# Altium PCB belt_control_V2.0.PcbDoc
Units mm, origin at the board's own origin, x right, y up, seen from the top; angles counter-clockwise.
Board outline 113.72 x 77.67 mm, 2 copper layers (Top Layer, Bottom Layer); 118 components, 83 nets, 434 pads, 124 vias.
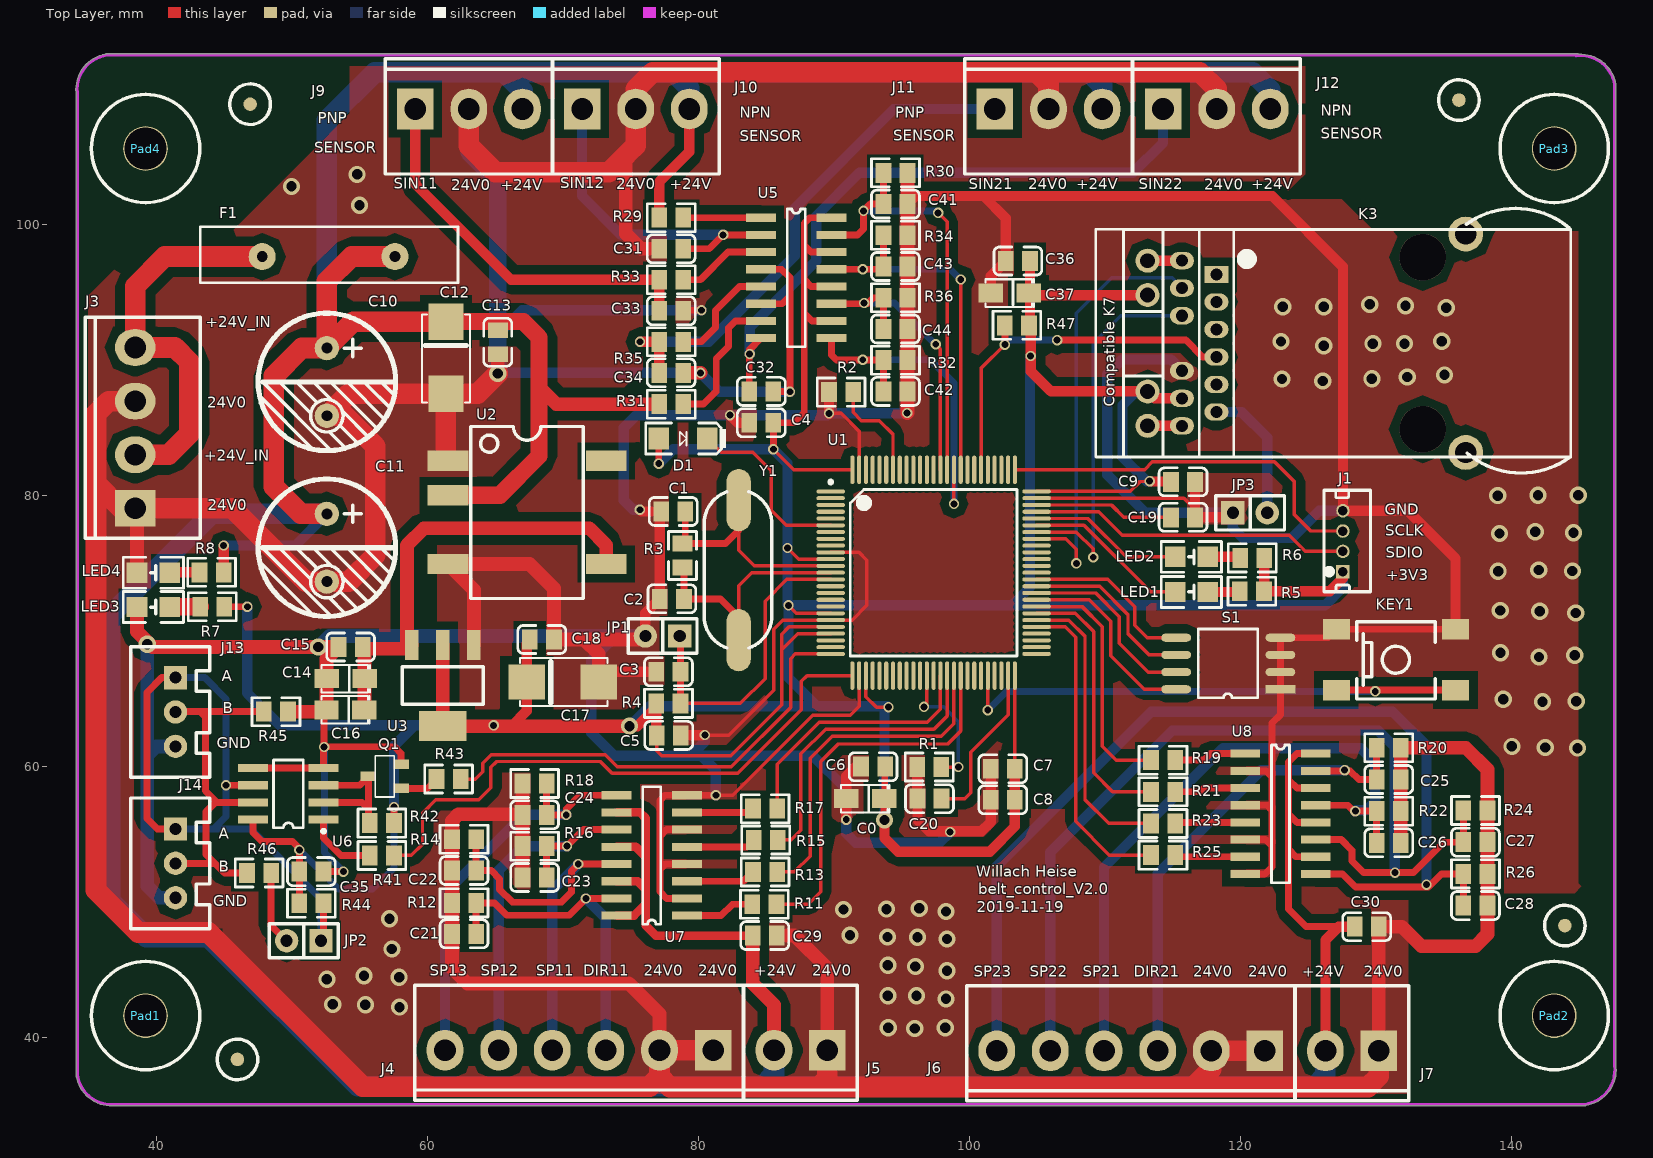
[diagram p0: Top Layer view]
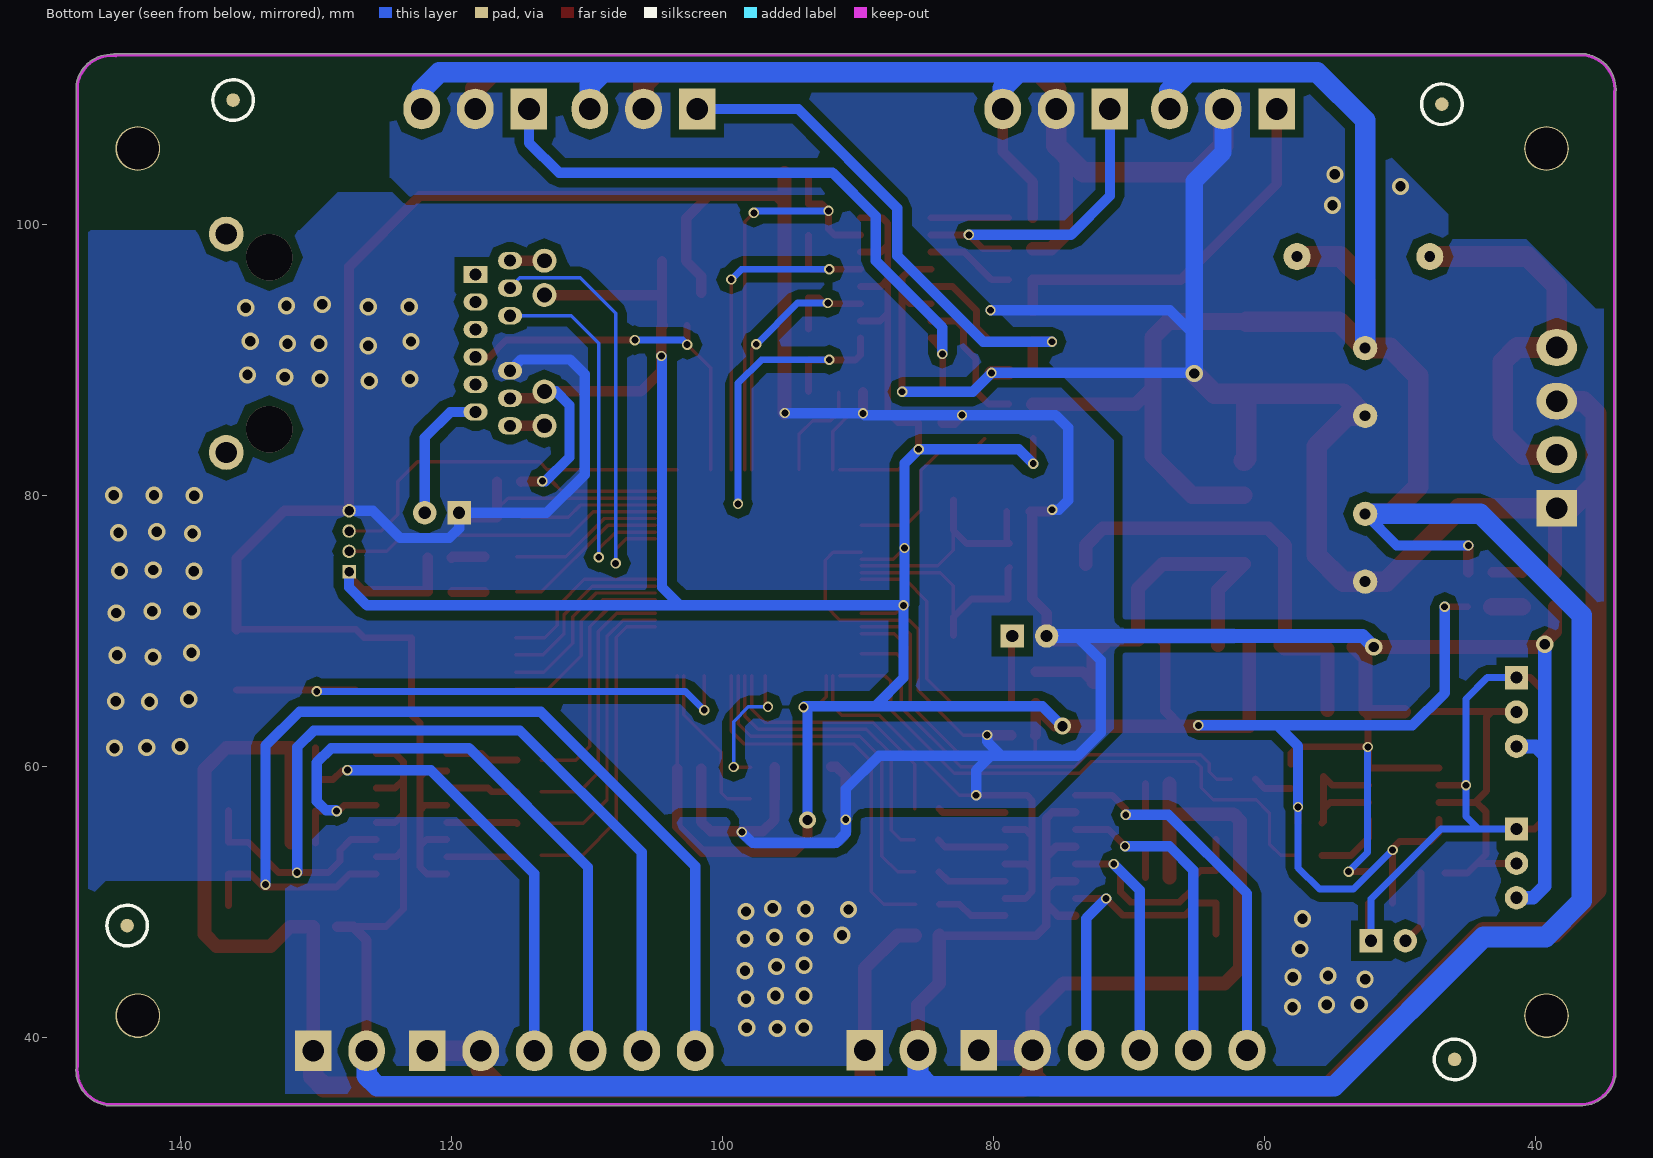
[diagram p1: Bottom Layer view, seen from below]
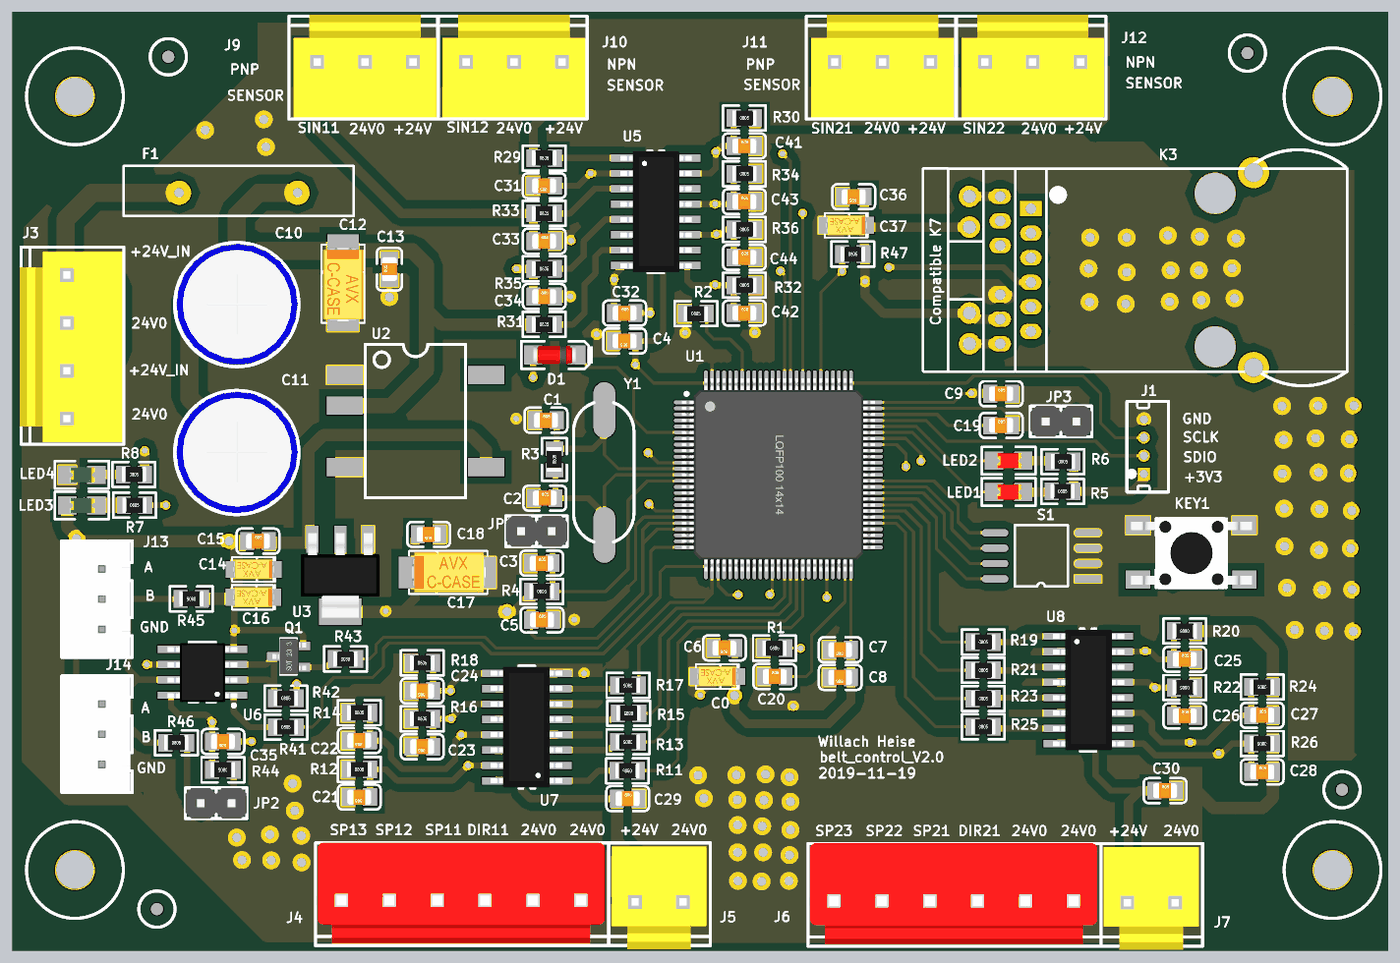
[diagram p2: 3D render of the assembled board from above, using the file's embedded part models]

## Layer stack, top to bottom
Top Solder: solder mask 0.0102, Solder Resist, Dk 3.5
Top Layer: signal copper 0.0356
Dielectric 1: dielectric 0.32, FR-4, Dk 4.8
Bottom Layer: signal copper 0.0356
Bottom Solder: solder mask 0.0102, Solder Resist, Dk 3.5

## Board outline
34.057,37.1 cw(c34.138,37.16) 34.037,37.16 34.037,109.75 cw(c36.664,109.982) 36.182,112.574 cw(c36.246,112.497) 36.246,112.597 144.932,112.597 cw(c144.932,112.497) 145.002,112.569 cw(c145.121,109.935) 147.724,110.354 cw(c147.625,110.338) 147.725,110.338 147.725,37.903 cw(c145.11,37.567) 147.747,37.567 cw(c145.11,37.567) 145.517,34.962 cw(c145.44,35.027) 145.44,34.926 36.728,34.926 cw(c36.728,35.027) 36.7,34.93 cw(c36.652,37.567)

## Design rules (kind name [scope] priority, off if disabled: settings)
Clearance Clearance_1 [InPolygon] p1: gap=0.635
Clearance [All] p2: gap=0.152
ComponentClearance [All] p1: gap=0 collisioncheckmode=3 verticalgap=0 showdistances=FALSE
HoleSize [All] p1: absolutevalues=TRUE maxlimit=5 minlimit=0.025 maxpercent=80.000 minpercent=20.000
HoleToHoleClearance [All] p1: gap=0 allowstackedmicrovias=TRUE
MinimumSolderMaskSliver [All] p1: minsoldermaskwidth=0
PlaneConnect [All] p1: planeconnectstyle=Direct reliefexpansion=0.508 reliefentries=4 reliefconductorwidth=0.254 reliefairgap=0.254
PolygonConnect [All] p1: connectstyle=Direct reliefconductorwidth=0.5 reliefentries=4 polygonreliefangle="90 Angle" airgapwidth=0.254
RoutingVias [All] p1: holewidth=0.4 width=0.8 viastyle="Through Hole" minholewidth=0.4 minwidth=0.8 maxholewidth=0.8 maxwidth=1.5
SilkToSilkClearance [All] p1: silktosilkclearance=0
SilkToSolderMaskClearance [IsPad] p1: minsilkscreentomaskgap=0 clearancetoexposedcopper=TRUE
SolderMaskExpansion [All] p1: expansion=0.102
Width [All] p1: maxlimit=5 minlimit=0.254 preferedwidth=0.508
22 further rules are at their usual default settings.

## Classes and differential pairs
component class power: C10 C11 C12 C13 C14 C15 C16 C17 C18 F1 J3 LED3 LED4 Pad1 Pad2 Pad3 Pad4 R7 R8 U2 U3
component class senror_input: C31 C32 C33 C34 C41 C42 C43 C44 J9 J10 J11 J12 R29 R30 R31 R32 R33 R34 R35 R36 U5
component class belt_output: C21 C22 C23 C24 C25 C26 C27 C28 C29 C30 J4 J5 J6 J7 R11 R12 R13 R14 R15 R16 R17 R18 R19 R20 R21 R22 R23 R24 R25 R26 U7 U8
component class communication: C35 C36 C37 J13 J14 JP2 JP3 K3 Q1 R41 R42 R43 R44 R45 R46 R47 U6
component class cpu: C0 C1 C2 C3 C4 C5 C6 C7 C8 C9 C19 C20 D1 J1 JP1 KEY1 LED1 LED2 R1 R2 R3 R4 R5 R6 S1 U1 Y1

## Components (designator, comment, footprint, x,y, rotation, side; value= is the part's Value field where it differs from the comment)
C0 "10uF/16V" CASE-A_3216 92.304,57.607 r180 top
C1 "22pF" 0805_CAP 78.13,78.816 r0 top
C2 "22pF" 0805_CAP 78.029,72.365 r0 top
C3 "0.1uF" 0805_CAP 77.775,66.98 r0 top
C4 "0.1uF" 0805_CAP 84.633,85.369 r180 top
C5 "0.1uF" 0805_CAP 77.8,62.281 r0 top
C6 "0.1uF" 0805_CAP 92.888,59.969 r180 top
C7 "0.1uF" 0805_CAP 102.464,59.817 r180 top
C8 "0.1uF" 0805_CAP 102.464,57.531 r180 top
C9 "0.1uF" 0805_CAP 115.773,81.001 r0 top
C10 "470uF/35V" CE/10MM 52.553,90.881 r270 top
C11 "470uF/35V" CE/10MM 52.553,78.638 r270 top
C12 "10uF/35V" TC6032_C 61.341,90.17 r270 top
C13 "0.1uF" 0805_CAP 65.176,91.313 r90 top
C14 "10uF/16V" CASE-A_3216 53.95,66.472 r180 top
C15 "0.1uF" 0805_CAP 54.305,68.809 r0 top
C16 "10uF/16V" CASE-A_3216 53.924,64.16 r180 top
C17 "100uF/16V" TC6032_C 69.977,66.218 r0 top
C18 "0.1uF" 0805_CAP 68.428,69.367 r180 top
C19 "10uF" 0805_CAP 115.773,78.384 r0 top
C20 "10uF" 0805_CAP 97.053,57.607 r0 top
C21 "0.1uF" 0805_CAP 62.684,47.625 r180 top
C22 "0.1uF" 0805_CAP 62.684,52.299 r180 top
C23 "0.1uF" 0805_CAP 67.891,51.791 r180 top
C24 "0.1uF" 0805_CAP 67.891,56.413 r180 top
C25 "0.1uF" 0805_CAP 130.962,59.026 r0 top
C26 "0.1uF" 0805_CAP 130.962,54.345 r0 top
C27 "0.1uF" 0805_CAP 137.367,54.393 r0 top
C28 "0.1uF" 0805_CAP 137.367,49.712 r0 top
C29 "0.1uF" 0805_CAP 84.887,47.498 r0 top
C30 "0.1uF" 0805_CAP 129.337,48.158 r0 top
C31 "0.1uF" 0805_CAP 77.978,98.217 r180 top
C32 "0.1uF" 0805_CAP 84.633,87.681 r0 top
C33 "0.1uF" 0805_CAP 77.978,93.635 r0 top
C34 "0.1uF" 0805_CAP 77.978,89.052 r0 top
C35 "0.1uF" 0805_CAP 51.41,52.222 r180 top
C36 "0.1uF" 0805_CAP 103.581,97.307 r180 top
C37 "10uF/16V" CASE-A_3216 102.972,94.945 r180 top
C41 "0.1uF" 0805_CAP 94.539,101.514 r0 top
C42 "0.1uF" 0805_CAP 94.539,87.681 r0 top
C43 "0.1uF" 0805_CAP 94.539,96.903 r0 top
C44 "0.1uF" 0805_CAP 94.539,92.292 r0 top
D1 "1N4148" LL-34(玻璃二极管) 77.064,84.201 r0 top
F1 "X30_UF600" X30UF600 47.777,97.663 r0 top
J1 "1.50mm" PH1.5_4P 127.584,74.371 r90 top
J3 "3.96mm" VH3.96_4P 38.405,79.045 r90 top
J4 "3.96mm" VH3.96_6P 81.077,39.04 r180 top
J5 "HEADER1X2" VH3.96_2P 89.51,39.04 r180 top
J6 "3.96mm" VH3.96_6P 121.818,38.989 r180 top
J7 "HEADER1X2" VH3.96_2P 130.226,38.989 r180 top
J9 "HEADER1X3" VH3.96_3P 59.08,108.534 r0 top
J10 "HEADER1X3" VH3.96_3P 71.399,108.534 r0 top
J11 "HEADER1X3" VH3.96_3P 101.879,108.534 r0 top
J12 "HEADER1X3" VH3.96_3P 114.3,108.534 r0 top
J13 "XH2.54" XH2,.54-3P 41.377,66.548 r270 top
J14 "XH2.54" XH2,.54-3P 41.377,55.372 r270 top
JP1 "JUMPER" SIP2 78.613,69.621 r180 top
JP2 "JUMPER" SIP2 52.121,47.117 r180 top
JP3 "JUMPER" SIP2 119.456,78.715 r0 top
K3 "USR_K3" USR-K3 118.237,96.317 r0 top
KEY1 "SPEED" SW_PB_SMD_6X6 131.496,67.869 r0 top
LED1 "LED" 0805-LED-R 117.602,72.873 r180 top
LED2 "LED" 0805-LED-R 117.602,75.463 r180 top
LED3 "LED" 0805-LED-G 40.945,71.755 r180 top
LED4 "LED" 0805-LED-G 40.945,74.295 r180 top
Pad1 "Pad" pad35 39.141,41.589 r0 top
Pad2 "Pad" pad35 143.159,41.589 r0 top
Pad3 "Pad" pad35 143.159,105.613 r0 top locked
Pad4 "Pad" pad35 39.141,105.613 r0 top locked
Q1 "8050" SOT-23 57.531,59.258 r90 top
R1 "10k" 0805_RES 97.028,59.944 r0 top
R2 "10k" 0805_RES 90.526,87.63 r0 top
R3 "1M" 0805_RES 78.816,75.565 r90 top
R4 "10k" 0805_RES 77.775,64.643 r0 top
R5 "2.2K" 0805_RES 120.859,72.923 r0 top
R6 "2.2K" 0805_RES 120.885,75.387 r0 top
R7 "2.2K" 0805_RES 44.094,71.78 r0 top
R8 "10K" 0805_RES 44.044,74.32 r0 top
R11 "330R" 0805_RES 84.861,49.809 r180 top
R12 "10K" 0805_RES 62.684,49.911 r0 top
R13 "330R" 0805_RES 84.912,52.197 r180 top
R14 "10K" 0805_RES 62.684,54.61 r0 top
R15 "330R" 0805_RES 84.963,54.559 r180 top
R16 "10K" 0805_RES 67.891,54.102 r0 top
R17 "330R" 0805_RES 84.912,56.871 r180 top
R18 "10K" 0805_RES 67.891,58.725 r0 top
R19 "330R" 0805_RES 114.3,60.452 r0 top
R20 "10K" 0805_RES 130.962,61.366 r180 top
R21 "330R" 0805_RES 114.3,58.115 r0 top
R22 "10K" 0805_RES 130.962,56.686 r180 top
R23 "330R" 0805_RES 114.3,55.778 r0 top
R24 "10K" 0805_RES 137.367,56.734 r180 top
R25 "330R" 0805_RES 114.3,53.442 r0 top
R26 "10K" 0805_RES 137.367,52.053 r180 top
R29 "2.2K" 0805_RES 77.978,100.508 r0 top
R30 "10K" 0805_RES 94.539,103.82 r0 top
R31 "2.2K" 0805_RES 77.978,86.741 r0 top
R32 "10K" 0805_RES 94.539,89.986 r0 top
R33 "2.2K" 0805_RES 77.978,95.926 r0 top
R34 "10K" 0805_RES 94.539,99.209 r0 top
R35 "2.2K" 0805_RES 77.978,91.343 r0 top
R36 "10K" 0805_RES 94.539,94.597 r0 top
R41 "330R" 0805_RES 56.617,53.416 r0 top
R42 "4.7K" 0805_RES 56.617,55.804 r0 top
R43 "4.7K" 0805_RES 61.544,59.055 r180 top
R44 "4.7K" 0805_RES 51.41,49.886 r180 top
R45 "4.7K" 0805_RES 48.793,64.033 r180 top
R46 "120R" 0805_RES 47.549,52.121 r0 top
R47 "10k" 0805_RES 103.505,92.558 r0 top
S1 "SW DIP-4" SOP8_switch 122.961,65.684 r180 top
U1 "STM32F407VET6" LQFP100_14x14 97.358,74.295 r0 top
U2 "B2405XT-2WR2" B2405XT-2WR2 67.361,85.09 r270 top
U3 "AMS1117-3.3" SOT223_3 61.112,65.964 r90 top
U5 "TLP290-4" SO16 84.607,100.508 r0 top
U6 "MAX3485" SOIC-8_150mil 49.708,57.963 r90 top
U7 "TLP290-4" SO16 79.146,48.971 r180 top
U8 "TLP290-4" SO16 120.371,60.935 r0 top
Y1 "8MHz" XTAL_US1 82.956,69.317 r90 top

## Footprints (in the part's own frame and the unit in brackets; to place one, negate y for a bottom-side part, rotate by r counter-clockwise, add the part's x,y. Pads: shape width x height; smd on the part's side, far side on the other; paste and mask are expansions set on the pad)
0805-LED-G [mil]
  rect 60x59.05 smd: 1(0,0) 2(95,0)
  silkscreen extent -40,-45 135,45, body extent 6,-24 84,25, height 32
0805-LED-R [mil]
  rect 60x59.05 smd: 1(0,0) 2(95,0)
  silkscreen extent -40,-45 135,45, body extent 6,-24 84,25, height 32
0805_CAP [mm]
  rect 1.16x1.47 smd: 1(-0.89,0) 2(0.89,0)
  silkscreen extent -1.77,-1.04 1.77,1.04, body extent -1,-0.62 1,0.63, height 0.77
0805_RES [mm]
  rect 1.16x1.47 smd: 1(-0.89,0) 2(0.89,0)
  silkscreen extent -1.77,-1.04 1.77,1.03, body extent -1,-0.62 1,0.63, height 0.49
B2405XT-2WR2 [mm]
  rect 1.5x3 smd: 1(2.54,-5.866) 2(5.08,-5.866) 4(10.16,-5.866) 5(10.16,5.818) 8(2.54,5.818)
  silkscreen extent 0,-4.17 12.7,4.13
CASE-A_3216 [mm]
  rect 1.8x1.4 smd: 1(-1.4,0) 2(1.4,0)
  silkscreen extent -1.78,-1.02 1.78,1.02, body extent -1.7,-0.84 1.7,0.84, height 1.71
CE/10MM [mm]
  round 1.8 hole 0.8: 1(0,0) 2(5,0)
  silkscreen extent -2.58,-5.08 7.58,5.08, body extent -2.55,-5 7.5,5.05, height 16.53
LL-34(玻璃二极管) [mm]
  rect 1.524x1.6 smd: 1(0,0) 2(3.586,0)
  silkscreen extent -0.97,-1.14 4.96,1.14, body extent 0.03,-0.75 3.53,0.75, height 1.5
LQFP100_14x14 [mm]
  oval 2.1x0.3 smd: 1(-7.6,6) 2(-7.6,5.5) 3(-7.6,5) 4(-7.6,4.5) 5(-7.6,4) 6(-7.6,3.5) 7(-7.6,3) 8(-7.6,2.5) 9(-7.6,2) 10(-7.6,1.5) 11(-7.6,1) 12(-7.6,0.5) 13(-7.6,0) 14(-7.6,-0.5) 15(-7.6,-1) 16(-7.6,-1.5) 17(-7.6,-2) 18(-7.6,-2.5) 19(-7.6,-3) 20(-7.6,-3.5) 21(-7.6,-4) 22(-7.6,-4.5) 23(-7.6,-5) 24(-7.6,-5.5) 25(-7.6,-6) 51(7.6,-6) 52(7.6,-5.5) 53(7.6,-5) 54(7.6,-4.5) 55(7.6,-4) 56(7.6,-3.5) 57(7.6,-3) 58(7.6,-2.5) 59(7.6,-2) 60(7.6,-1.5) 61(7.6,-1) 62(7.6,-0.5) 63(7.6,0) 64(7.6,0.5) 65(7.6,1) 66(7.6,1.5) 67(7.6,2) 68(7.6,2.5) 69(7.6,3) 70(7.6,3.5) 71(7.6,4) 72(7.6,4.5) 73(7.6,5) 74(7.6,5.5) 75(7.6,6)
  oval 0.3x2.1 smd: 26(-6,-7.6) 27(-5.5,-7.6) 28(-5,-7.6) 29(-4.5,-7.6) 30(-4,-7.6) 31(-3.5,-7.6) 32(-3,-7.6) 33(-2.5,-7.6) 34(-2,-7.6) 35(-1.5,-7.6) 36(-1,-7.6) 37(-0.5,-7.6) 38(0,-7.6) 39(0.5,-7.6) 40(1,-7.6) 41(1.5,-7.6) 42(2,-7.6) 43(2.5,-7.6) 44(3,-7.6) 45(3.5,-7.6) 46(4,-7.6) 47(4.5,-7.6) 48(5,-7.6) 49(5.5,-7.6) 50(6,-7.6) 76(6,7.6) 77(5.5,7.6) 78(5,7.6) 79(4.5,7.6) 80(4,7.6) 81(3.5,7.6) 82(3,7.6) 83(2.5,7.6) 84(2,7.6) 85(1.5,7.6) 86(1,7.6) 87(0.5,7.6) 88(0,7.6) 89(-0.5,7.6) 90(-1,7.6) 91(-1.5,7.6) 92(-2,7.6) 93(-2.5,7.6) 94(-3,7.6) 95(-3.5,7.6) 96(-4,7.6) 97(-4.5,7.6) 98(-5,7.6) 99(-5.5,7.6) 100(-6,7.6)
  silkscreen extent -7.72,-6.15 6.15,6.82, body extent -8,-8 8,8, height 1.45
pad35 [mm]
  round 3.3 hole 3.1: 1(0.025,0)
  silkscreen extent -3.97,-4 4.03,4
PH1.5_4P [mm]
  rect 1x1 hole 0.7: 1(0,0)
  round 1 hole 0.7: 2(1.5,0) 3(3,0) 4(4.5,0)
  silkscreen extent -1.5,-2.03 6,1.4
SIP2 [mil]
  rect 68x68 hole 35.43: 1(0,0)
  round 68 hole 35.43: 2(100,0)
  silkscreen extent -50,-50 150,50, body extent -50,-50 150,50, height 336
SO16 [mm]
  rect 2.2x0.6 smd: 1(0,0) 2(0,-1.27) 3(0,-2.54) 4(0,-3.81) 5(0,-5.08) 6(0,-6.35) 7(0,-7.62) 8(0,-8.89) 9(5.2,-8.89) 10(5.2,-7.62) 11(5.2,-6.35) 12(5.2,-5.08) 13(5.2,-3.81) 14(5.2,-2.54) 15(5.2,-1.27) 16(5.2,0)
  silkscreen extent 1.93,-9.53 3.26,0.64, body extent -0.32,-9.44 5.59,0.55, height 1.45
SOIC-8_150mil [mm]
  rect 0.6x2.2 smd: 1(-1.905,-2.6) 2(-0.635,-2.6) 3(0.635,-2.6) 4(1.905,-2.6) 5(1.905,2.6) 6(0.635,2.6) 7(-0.635,2.6) 8(-1.905,2.6)
  silkscreen extent -2.88,-2.72 2.5,1.1, body extent -2.49,-2.89 2.41,2.89, height 1.45
SOP8_switch [mm]
  rect 2.2x0.6 smd: 1(0,0)
  oval 2.2x0.6 smd: 2(0,-1.27) 3(0,-2.54) 4(0,-3.81) 5(7.695,-3.81) 6(7.695,-2.54) 7(7.695,-1.27) 8(7.695,0)
  silkscreen extent 1.68,-4.44 6.06,0.64
SOT223_3 [mm]
  rect 2.2x1 smd: 1(3,-2.3) 2(3,0) 3(3,2.3)
  rect 2.2x3.5 smd: 4(-3,0)
  silkscreen extent -1.4,-3 1.4,3, body extent -3.49,-3.24 3.49,3.24, height 1.64
SOT-23 [mil]
  rect 28x45 smd: 1(-35,-20) 2(35,-20) 3(0,75)
  silkscreen extent -60,0 60,55, body extent -57,-30 57,80, height 47
SW_PB_SMD_6X6 [mm]
  rect 2x1.5 smd: 1(-4.4,-2.25) 1(4.4,-2.25) 2(-4.4,2.25) 2(4.4,2.25)
  silkscreen extent -2.9,-2.9 2.9,2.8, body extent -4.97,-3.05 5.03,2.95, height 5.1
TC6032_C [mm]
  rect 2.7x2.6 smd: 1(-2.667,0) 2(2.65,0)
  silkscreen extent -3.18,-1.78 3.3,1.78, body extent -2.92,-1.67 3.18,1.68, height 2.7
USR-K3 [mil]
  rect 70x50 hole 35: 1(0,0)
  oval 70x50 hole 35: 2(0,-80) 3(0,-160) 4(0,-240) 5(0,-320) 6(0,-400) 7(-100,40) 8(-100,-40) 9(-100,-120) 10(-100,-280) 11(-100,-360) 12(-100,-440)
  round 70 hole 43: 13(-200,40) 14(-200,-60) 15(-200,-340) 16(-200,-440)
  round 101.18 hole 61.81: 17(725,-517.5) 17(725,117.5)
  silkscreen extent -351,-577 1030,192
VH3.96_2P [mm]
  rect 2.7x3 hole 1.6: 1(0,0)
  oval 2.7x3 hole 1.6: 2(3.937,0)
  silkscreen extent -2.22,-4.8 6.18,3.7, body extent -1.9,-4.5 5.96,4, height 10.9
VH3.96_3P [mm]
  rect 2.7x3 hole 1.6: 1(0,0)
  oval 2.7x3 hole 1.6: 2(3.96,0) 3(7.92,0)
  silkscreen extent -2.22,-4.8 10.14,3.7, body extent -1.82,-4.68 10,3.82, height 10.9
VH3.96_4P [mm]
  rect 2.7x3 hole 1.6: 1(0,0)
  oval 2.7x3 hole 1.6: 2(3.96,0) 3(7.92,0) 4(11.88,0)
  silkscreen extent -2.22,-4.8 14.1,3.7, body extent -2.05,-4.69 13.73,3.81, height 10.9
VH3.96_6P [mm]
  rect 2.7x3 hole 1.6: 1(0,0)
  oval 2.7x3 hole 1.6: 2(3.96,0) 3(7.92,0) 4(11.88,0) 5(15.84,0) 6(19.8,0)
  silkscreen extent -2.22,-4.8 22.02,3.7, body extent -1.92,-4.84 21.84,3.56, height 14.6
X30UF600 [mm]
  round 2 hole 0.8: 1(0,-0.025) 2(9.804,-0.025)
  silkscreen extent -4.57,-1.96 14.45,2.18
XH2,.54-3P [mil]
  rect 68x68 hole 35.43: 1(0,0)
  round 68 hole 35.43: 2(100,0) 3(200,0)
  silkscreen extent -90,-130 290,100, body extent -95,-133 295,93, height 276
XTAL_US1 [mm]
  oval 4.6x1.8 smd: 1(0,0) 2(10.338,0)
  silkscreen extent -0.58,-2.45 10.95,2.55

## Part data
C0 C10 C11 C12 C14 C16 C17 C37: library part ELECTRO2, "Electrolytic Capacitor"
C1 C2 C3 C4 C5 C6 C7 C8 C9 C36: library part CAP, "Capacitor"
C13 C15 C18 C21 C22 C23 C24 C25 C26 C27 C28 C29 C30 C31 C32 C33 C34 C35 C41 C42 C43 C44: library part Cap, "Capacitor"
C19 C20: library part "0805 100nF(104) 10% 50V", "贴片电容"
D1: library part DIODE, "LL-34(玻璃二极管)"
F1: library part "Fuse 1", "Fuse"
J1 J3: library part CON4, "Connector"
J4: library part "Header 6H", "Header, 6-Pin, Right Angle"
J6: library part "Header 6", "Header, 6-Pin"
J13 J14: library part CON3, "Connector"
JP1: "2.54间距，2P，单排插针"
JP2 JP3: "Jumper"
K3: library part USR-K
KEY1: library part SW-KEY-2
LED1 LED2 LED3 LED4: library part LED2, "Typical RED, GREEN, YELLOW, AMBER GaAs LED"
Q1: library part 3NPN_SO_1
R1 R2 R3 R4 R47: library part RES
R5 R6 R7 R8 R11 R12 R13 R14 R15 R16 R17 R18 R19 R20 R21 R22 R23 R24 R25 R26 R29 R30 R31 R32 R33 R34 R35 R36 R41 R42 R43 R44 R45 R46: library part Res2, "Resistor"
S1: "DIP Switch"
U1: library part STM32F2xx_100, "STM32 ARM-based 32-bit MCU with 64 Kbytes Flash, 100-pin LQFP, Industrial Temperature"
U3: library part AMS1117-5
U5 U7 U8: library part TLP521-4
U6: library part MAX485
Y1: library part CRYSTAL, "Crystal"

## Free pads (board coordinates)
  round 1 smd: 0(45.949,38.354) 0(46.888,108.89) 0(136.144,109.195) 0(143.967,48.235)
  round 1 smd far side: 4(45.949,38.354) 4(46.888,108.89) 4(136.144,109.195) 4(143.967,48.235)

## Via types
v1: diameter 1.27, hole 0.762, Top Layer to Bottom Layer, 69 vias
v2: diameter 0.762, hole 0.508, Top Layer to Bottom Layer, 53 vias
v3: diameter 3.4, hole 3.4, Top Layer to Bottom Layer, 2 vias

## Nets (pads, with @x,y where several pads share a name; then routed paths per layer and width w, separated by ;. In a path a pad name is that pad's centre, name@x,y a point inside that pad or via, vN(x,y) a via of type N, cw(c..) or ccw(c..) an arc to the next point about the centre after c; other vN are vias at no path point)
24V0: C10.2 C11.2 C12.2 C13.1 C21.2 C22.2 C23.2 C24.2 C25.2 C26.2 C27.2 C28.2 C29.2 C30.2 C31.2 C32.2 C33.2 C34.2 J3.1 J3.3 J4.1 J4.2 J5.1 J6.1 J6.2 J7.1 J9.2 J10.2 J11.2 J12.2 LED4.2 R12.1 R14.1 R16.1 R18.1 R20.1 R22.1 R24.1 R26.1 U2.1 U5.4 U5.6 | length 471.4
  Top Layer w0.508: C33.2@78.909,93.675 v2(80.213,93.675) ; U5.6 86.182,94.158 86.741,94.717 ; U5.4 86.131,96.698 86.741,96.088 86.741,94.717 ; C32.2 86.716,87.681 v2(86.741,87.655) 86.741,94.717
  Top Layer w0.762: 74.625,104.673 74.625,105.105 74.816,105.296
  Top Layer w1.016: J3.1 38.532,78.918 LED4.2 ; v1(65.176,89.002) C13.1 ; C23.2 R16.1 C24.2 ; R18.1 C24.2 ; 74.625,104.673 74.625,99.339 75.748,98.217 C31.2 ; J4.2 77.117,41.704 74.854,43.967 62.916,43.967 61.794,45.089 C21.2 C22.2 R14.1 61.794,55.977 62.281,56.464 66.95,56.464 C24.2 ; C34.2 v2(80.137,89.052) ; C29.2 87.097,47.498 89.51,45.085 J5.1 ; J7.1 J7.1 C30.2 131.928,48.158 133.375,46.711 137.363,46.711 138.257,47.604 C28.2 R26.1 R24.1 138.257,59.762 136.652,61.366 R20.1 C25.2 C26.2
  Top Layer w1.524: J3.3 36.444,86.965 35.509,86.03 35.509,80.874 ; U2.1 61.341,82.704 C12.2 ; J9.2 63.04,105.819 65.007,103.852 73.372,103.852 74.625,105.105 ; v1(65.176,89.002) 63.695,87.52 C12.2 ; 74.816,105.296 75.359,105.839 J10.2 75.359,110.005 76.606,111.252 104.953,111.252 ; J4.1 J4.2 77.117,37.086 ; J5.1 89.51,36.957 88.875,36.322 ; J11.2 105.839,110.365 104.953,111.252 ; J12.2 118.26,110.01 117.018,111.252 104.953,111.252 ; J6.1 J6.2 117.858,37.645 116.535,36.322 ; J7.1 130.226,37.109 129.438,36.322 116.535,36.322 ; 35.509,80.874 35.509,50.851 38.633,47.727 43.815,47.727 55.194,36.347 76.378,36.347 77.117,37.086 ; 35.509,80.874 37.338,79.045 J3.1 45.593,79.045 50.999,73.638 C11.2 54.182,73.638 56.134,75.59 56.134,83.642 53.895,85.881 C10.2 54.191,87.52 C12.2 ; 77.117,37.086 77.881,36.322 88.875,36.322 ; 88.875,36.322 116.535,36.322
  Bottom Layer w0.762: 65.176,91.872 66.98,93.675 v2(80.213,93.675) ; v1@65.227,89.052 v2(80.137,89.052) 81.534,87.655 v2(86.741,87.655)
  Bottom Layer w1.27: J9.2 63.04,105.336 65.176,103.2 65.176,91.872 v1(65.176,89.002)
  other v1: 95.961,40.64 94.005,40.691 98.222,40.691 57.912,42.215 55.397,42.393 52.984,42.418 98.273,42.824 93.98,43.053 96.088,43.053 52.553,44.272 57.887,44.425 55.296,44.526 98.349,44.907 96.012,45.212 93.98,45.314 57.353,46.507 98.349,47.244 96.164,47.371 93.955,47.396 91.186,47.523 57.175,48.743 98.273,49.276 90.703,49.428 93.878,49.454 96.291,49.505 54.966,101.422 49.936,102.819 54.788,103.708
485A: J13.1 J14.1 JP2.1 R44.1 U6.6 | length 49.5
  Top Layer w0.508: J14.1 40.03,55.372 39.268,56.134 39.268,65.456 40.361,66.548 J13.1 ; v2(45.11,58.598) U6.6 ; JP2.1 52.3,47.296 R44.1
  Bottom Layer w0.508: J14.1 44.188,55.372 ; J13.1 43.536,66.548 45.11,64.973 v2(45.11,58.598) 45.11,56.294 44.188,55.372 ; JP2.1 52.121,50.216 46.965,55.372 44.188,55.372
485B: J13.2 J14.2 R45.2 R46.1 U6.7 | length 27.1
  Top Layer w0.508: J14.2 44.298,52.832 ; J13.2 41.402,64.033 R45.2 ; 43.231,64.008 43.586,63.652 43.586,58.191 44.45,57.328 ; R46.1 45.009,52.121 44.298,52.832 ; U6.7 44.45,57.328 ; 44.298,52.832 43.637,53.492 43.637,56.642 44.323,57.328 44.45,57.328
+3.3V: C0.1 C4.1 C5.1 C6.1 C7.1 C8.1 C9.1 C17.1 C18.2 C35.2 C36.1 C37.1 D1.1 J1.1 K3.11 K3.14 K3.15 R4.1 R5.2 R6.2 R7.2 R42.2 R44.2 R47.2 U1.11 U1.19 U1.21 U1.22 U1.28 U1.50 U1.75 U1.100 U3.2 U3.4 U5.10 U5.12 U5.14 U5.16 U6.8 | length 363.4
  Top Layer w0.254: C5.1 76.91,61.139 77.267,60.782 82.372,60.782 86.131,64.541 86.131,68.605 ; v2(85.523,83.413) 87.04,81.895 U1.100 ; v2(86.563,76.124) 87.392,75.295 U1.11 ; v2(86.639,71.882) 87.226,71.295 U1.19 ; U1.22 87.321,69.795 86.131,68.605 ; U1.21 86.678,70.295 86.131,69.748 86.131,68.605 ; U1.28 92.358,65.147 93.142,64.364 v2(94.031,64.364) ; C7.1 103.358,59.822 U1.50 ; U1.75 111.867,80.295 112.598,81.026 v2@113.309,81.026 ; C9.1@114.832,81.001 C9.1@114.883,80.95
  Top Layer w0.508: R7.2 v2(46.685,71.78) ; U6.8 47.108,55.102 47.767,54.442 50.003,54.442 50.52,53.925 v2(50.52,53.823) C35.2 R44.2 ; R42.2 v2(57.507,56.997) ; v2(77.064,82.347) D1.1 ; v2(85.523,83.413) C4.1 87.046,85.369 87.808,86.131 87.808,93.447 ; U5.10 88.367,92.888 87.808,93.447 ; U5.12 88.316,95.428 87.808,95.936 ; U5.14 88.29,97.968 87.808,98.45 ; U5.16 88.214,100.508 87.808,100.101 87.808,98.45 ; C0.1 93.704,56.08 93.751,56.032 v1(93.726,56.032) ; C0.1@93.752,57.607 C6.1@93.752,59.969 ; C9.1@114.832,81.001 C9.1 ; 87.808,93.447 87.808,95.936 ; 87.808,95.936 87.808,98.45
  Top Layer w0.762: 66.19,62.964 67.31,64.084 C17.1 67.31,69.038 C18.2@67.538,69.266 ; v1(74.905,62.964) 75.485,62.964 R4.1@76.885,64.364 ; R4.1 R4.1@76.885,64.364 ; C5.1 76.885,62.306 R4.1@76.885,64.364 ; v1(93.726,56.032) 93.726,54.712 94.742,53.696 101.498,53.696 103.354,55.551 C8.1 C7.1 ; R47.2 104.521,92.432 v2(104.521,90.297) 104.521,89.179 106.02,87.681 K3.15 113.665,87.173 K3.11 ; R47.2@104.471,92.558 C37.1@104.471,94.945 ; C36.1 C37.1@104.471,94.945 ; K3.14 104.624,94.793 C37.1@104.471,94.945 ; v2@113.309,81.026 114.858,81.026 C9.1 ; R6.2 121.775,72.949 R5.2 126.619,72.923 127.584,73.889 J1.1
  Top Layer w1.016: U3.2 U3.4 66.19,62.964 v1(74.905,62.964)
  Bottom Layer w0.508: v2(50.52,53.823) 53.415,50.927 55.931,50.927 57.507,52.503 v2(57.507,56.997)
  Bottom Layer w0.762: v2(46.685,71.78) 46.685,65.407 49.074,63.017 59.03,63.017 ; v2(57.507,56.997) 57.507,61.494 59.03,63.017 ; v2(64.872,63.017) 59.03,63.017 ; v1(74.905,62.964) 76.381,64.44 88.722,64.44 ; v2(77.064,82.347) 78.129,83.413 v2(85.523,83.413) 86.563,82.372 v2(86.563,76.124) 86.563,71.958 v2(86.639,71.882) ; v1(93.726,56.032) 93.726,64.059 ; v2@93.955,64.44 88.722,64.44 ; v2(104.521,90.297) 104.47,90.246 104.47,73.203 103.149,71.882 ; K3.15 112.319,87.681 111.303,86.665 111.303,82.829 113.081,81.051 v2(113.309,81.051) ; J1.1 127.584,73.203 126.263,71.882 103.149,71.882 ; v2(86.639,71.882) 103.149,71.882 ; v2(86.639,71.882) 86.639,66.523 88.722,64.44
+5V: C14.1 C15.2 C16.1 U2.5 U3.3 | length 32.8
  Top Layer w1.016: C16.1 55.324,68.68 58.528,68.68 U3.3 58.471,69.305 58.471,76.327 59.715,77.572 71.933,77.572 73.179,76.326 U2.5
+24V: C10.1 C11.1 C12.1 C13.2 C29.1 C30.1 F1.2 J5.2 J7.2 J9.3 J10.3 J11.3 J12.3 R8.2 R29.1 R31.1 U2.2 U7.10 U7.12 U7.14 U7.16 U8.10 U8.12 U8.14 U8.16 | length 401.1
  Top Layer w0.508: U8.10 124.13,53.315 123.571,53.873 ; U8.12 124.206,55.855 123.571,56.49 ; U8.14 124.181,58.395 123.571,59.004 ; U8.16 124.181,60.935 123.571,60.325 123.571,59.004 ; 127.279,48.158 124.866,48.158 123.571,49.454 123.571,53.873 ; 123.571,53.873 123.571,56.49 ; 123.571,56.49 123.571,59.004
  Top Layer w0.635: U7.16 75.235,48.971 76.098,49.835 ; U7.14 75.489,51.511 76.098,50.902 ; U7.12 75.362,54.051 76.098,53.315 ; U7.10 75.667,56.591 76.098,56.159 76.098,53.315 ; C29.1 76.835,47.498 76.098,48.235 76.098,49.835 ; 76.098,49.835 76.098,50.902 ; 76.098,50.902 76.098,53.315
  Top Layer w0.762: R8.2 v2(44.934,76.301) ; R29.1 77.088,103.148 79.319,105.38 J10.3 ; J7.2 126.289,47.168 127.279,48.158 C30.1
  Top Layer w1.016: 68.224,88.011 69.494,86.741 R31.1 ; C29.1 83.997,43.968 85.573,42.393 J5.2
  Top Layer w1.27: C12.1 67.056,92.837 68.224,91.669 68.224,88.011 68.224,82.906 65.329,80.01 U2.2
  Top Layer w1.524: C11.1 50.648,78.638 48.641,80.645 48.641,88.824 50.698,90.881 C10.1 ; F1.2 54.381,97.638 52.553,95.809 C10.1 ; C12.1 54.508,92.837 C10.1
  Bottom Layer w0.762: v2(44.934,76.301) 50.215,76.301 C11.1
  Bottom Layer w1.524: C11.1 44.044,78.638 36.551,71.145 36.551,50.063 39.218,47.396 43.815,47.396 54.839,36.373 84.709,36.373 ; C10.1 52.553,107.696 56.109,111.252 65.634,111.252 ; J9.3 67,109.885 65.634,111.252 ; J10.3 79.319,110.063 78.13,111.252 ; J5.2 85.573,37.236 84.709,36.373 ; J11.3 109.799,110.292 108.839,111.252 ; J12.3 122.22,109.936 120.904,111.252 108.839,111.252 ; J7.2 126.289,37.16 125.501,36.373 84.709,36.373 ; 65.634,111.252 78.13,111.252 ; 78.13,111.252 108.839,111.252
+24V_IN: F1.1 J3.2 J3.4 | length 29.2
  Top Layer w1.524: J3.2 40.866,83.005 42.393,84.531 42.393,89.865 41.333,90.925 J3.4 38.405,95.453 40.589,97.638 F1.1
BOOT0: R2.2 U1.94 | length 7.7
  Top Layer w0.254: R2.2 91.416,86.13 92.024,85.522 93.345,85.522 94.358,84.509 U1.94
BOOT1: R1.2 U1.37 | length 10
  Top Layer w0.254: v2(96.647,64.389) 96.858,64.6 U1.37 ; R1.2 v2(99.187,59.944)
  Bottom Layer w0.254: v2(96.647,64.389) 98.095,64.389 99.187,63.297 v2(99.187,59.944)
DIR11: C21.1 J4.3 R12.2 U7.15 | length 25.4
  Top Layer w0.508: C21.1 R12.2 64.922,49.911 65.837,48.997 70.434,48.997 v2(71.679,50.241) U7.15
  Bottom Layer w0.762: v2(71.679,50.241) 73.157,48.763 J4.3
DIR21: C25.1 J6.3 R20.2 U8.15 | length 37.2
  Top Layer w0.508: U8.15 128.118,59.665 128.756,59.026 C25.1 R20.2
  Bottom Layer w0.762: J6.3 113.898,52.075 121.539,59.715 v2(127.711,59.715)
DIR_R11: R11.1 U1.42 | length 28.6
  Top Layer w0.254: R11.1 88.113,49.809 89.027,50.724 89.027,60.35 90.322,61.646 98.4,61.646 99.358,62.604 U1.42
DIR_R21: R19.1 U1.58 | length 18.3
  Top Layer w0.254: U1.58 108.316,71.795 109.804,70.307 109.804,61.493 110.846,60.452 R19.1
GND: C0.2 C1.1 C2.1 C3.1 C4.2 C5.2 C6.2 C7.2 C8.2 C9.2 C14.2 C15.1 C16.2 C17.2 C18.1 C19.2 C20.1 C35.1 C36.2 C37.2 C41.2 C42.2 C43.2 C44.2 J1.4 J13.3 J14.3 JP1.2 JP3.1 K3.10 KEY1.2 LED3.2 Q1.2 R1.1 R2.1 R30.2 R32.2 R34.2 R36.2 R45.1 S1.1 S1.2 S1.3 S1.4 U1.10 U1.20 U1.27 U1.74 U1.99 U2.4 U3.1 U6.4 U6.5 U7.2 U7.4 U7.6 U7.8 U8.2 U8.4 U8.6 U8.8 | length 490.2
  Top Layer w0.254: v2@80.239,62.281 82.22,62.281 85.547,65.608 85.547,70.129 86.213,70.795 U1.20 91.344,70.795 92.431,71.882 92.431,75.209 91.845,75.795 U1.10 ; v2(81.28,57.861) 82.525,57.861 88.417,63.754 91.186,63.754 91.858,64.426 U1.27 ; v2(89.636,86.056) 90.525,86.056 91.858,84.723 U1.99 ; U1.74 115.848,79.795 C19.2@116.663,78.979
  Top Layer w0.508: U6.5 U6.4 52.308,61.376 v2(52.349,61.417) ; C35.1 v2(53.772,52.222) ; C16.2 52.397,64.033 52.349,63.986 v2(52.349,61.417) ; Q1.2 58.039,60.96 57.556,61.443 52.375,61.443 v2(52.349,61.417) ; U7.2 77.648,50.241 77.14,50.749 77.14,52.375 ; U7.4 77.546,52.781 77.14,52.375 ; U7.6 77.648,55.321 77.14,54.813 ; v2(81.28,57.861) U7.8 77.516,57.861 77.14,57.485 77.14,54.813 ; U8.8 121.818,52.045 122.352,52.578 122.352,54.102 ; U8.6 121.869,54.585 122.352,54.102 ; U8.4 121.971,57.125 122.352,56.744 ; U8.2 121.895,59.665 122.352,59.207 ; KEY1.2@135.896,70.119 127.096,70.119 126.471,69.494 S1.4 S1.3 S1.2 S1.1 122.961,63.805 122.352,63.195 122.352,59.207 ; 77.14,52.375 77.14,54.813 ; 122.352,54.102 122.352,56.744 ; 122.352,56.744 122.352,59.207
  Top Layer w0.762: C17.2 73.389,66.98 C3.1 ; v2(75.667,78.943) 75.794,78.816 C1.1 77.139,78.715 C2.1 76.073,71.299 JP1.2 ; C5.2 v2@80.239,62.281 ; v2(82.321,85.928) 82.88,85.369 C4.2 ; v2(89.636,86.056) v2@89.662,86.03 ; v2@89.636,86.361 R2.1 ; v2(90.904,56.061) C0.2 90.904,59.281 91.592,59.969 C6.2 ; C41.2 96.023,102.108 101.041,102.108 ; R1.1 96.138,57.633 C20.1 96.163,56.059 97.028,55.194 100.889,55.194 101.574,55.879 C8.2 C7.2 ; C37.2 101.572,96.188 C36.2 102.691,100.458 101.041,102.108 ; C9.2 116.663,78.979 C19.2 119.126,78.384 JP3.1 ; KEY1.2@135.896,70.119 135.896,75.331 132.355,78.871 J1.4 127.584,96.901 122.377,102.108 101.041,102.108
  Top Layer w1.016: LED3.2 38.532,69.952 39.675,68.809 v1(51.918,68.809) C15.1 52.524,67.918 C16.2 ; R45.1 C16.2@52.397,64.033 ; U3.1 63.412,73.012 U2.4 67.513,74.93 69.318,73.126 C18.1 71.552,69.367 ; C17.2 72.627,68.292 71.552,69.367 ; JP1.2 75.819,69.367 71.552,69.367 ; v2(95.402,86.081) 95.429,86.107 C42.2 R32.2 R36.2 R34.2 R30.2
  Bottom Layer w0.508: v2(52.349,61.417) 52.375,61.392 52.375,53.619 v2(53.772,52.222)
  Bottom Layer w0.762: 73.889,69.621 72.085,67.818 72.085,62.484 73.787,60.782 79.426,60.782 ; v2(75.667,78.943) 75.184,78.943 74.473,79.654 74.473,84.988 75.413,85.928 v2(82.321,85.928) 89.508,85.928 v2(89.636,86.056) 95.378,86.056 v2(95.402,86.081) ; v2(80.467,62.306) 80.467,61.824 79.426,60.782 ; v2(81.28,57.861) 81.28,59.69 80.188,60.782 ; v2(98.577,55.143) 97.79,54.356 91.589,54.356 90.904,55.042 v2(90.904,56.061) 90.904,58.321 88.443,60.782 80.188,60.782 ; K3.10 114.859,90.043 111.277,90.043 110.185,88.951 110.185,81.534 113.005,78.715 JP3.1 119.456,77.572 120.167,76.86 123.825,76.86 125.836,78.871 J1.4 ; 79.426,60.782 80.188,60.782
  Bottom Layer w1.016: v1(39.294,69.012) 39.294,60.808 ; J14.3 40.157,50.292 39.294,51.156 39.294,60.808 ; J13.3 39.954,61.468 39.294,60.808 ; v1(51.918,68.809) 52.73,69.621 73.889,69.621 JP1.2
  other v1: 144.907,61.341 142.519,61.392 140.056,61.468 142.316,64.77 144.805,64.795 139.421,64.948 142.062,68.072 144.704,68.199 139.217,68.377 144.78,71.323 142.113,71.45 139.192,71.501 139.04,74.397 144.526,74.422 142.037,74.498 139.141,77.191 144.602,77.241 141.783,77.318 139.014,79.985 141.986,80.01 144.958,80.01 126.086,88.443 123.088,88.595 129.718,88.621 132.334,88.748 135.077,88.9 126.162,91.059 129.794,91.211 132.131,91.211 123.012,91.364 134.874,91.389 135.204,93.853 123.139,93.929 126.162,93.929 132.207,94.005 129.565,94.107
KEY1: KEY1.1 U1.46 | length 40.7
  Top Layer w0.254: v2(101.358,64.147) U1.46
  Top Layer w0.508: KEY1.1@127.096,65.619 129.885,65.619 v2(129.972,65.532) 130.059,65.619 KEY1.1@135.896,65.619
  Bottom Layer w0.508: v2(101.358,64.147) 102.743,65.532 v2(129.972,65.532) v2@130.099,65.532
LED1: LED1.2 U1.70 | length 12.3
  Top Layer w0.254: U1.70 108.463,77.795 113.386,72.873 LED1.2
LED2: LED2.2 U1.71 | length 11.4
  Top Layer w0.254: U1.71 108.751,78.295 111.582,75.463 LED2.2
NetC19_1: C19.1 U1.73 | length 10.4
  Top Layer w0.254: U1.73 110.494,79.295 111.404,78.384 C19.1 ; C19.1@114.883,78.638 C19.1@114.959,78.638
NetC20_2: C20.2 U1.49 | length 12.1
  Top Layer w0.254: C20.2 99.67,57.607 100.101,58.039 100.101,61.036 102.858,63.793 U1.49
NetD1_2: D1.2 U1.6 | length 13.5
  Top Layer w0.254: D1.2 81.666,83.185 83.998,83.185 85.369,81.813 85.369,78.892 86.467,77.795 U1.6
NetJP2_2: JP2.2 R46.2 | length 5.5
  Top Layer w0.508: R46.2 48.439,48.259 JP2.2
NetJP3_2: JP3.2 K3.6 | length 10.1
  Bottom Layer w0.762: K3.6 120.117,86.157 121.996,84.277 JP3.2
NetK3_7: K3.7 K3.13 | length 2.5
  Top Layer w0.762: K3.13 K3.7
NetK3_12: K3.12 K3.16 | length 2.5
  Top Layer w0.762: K3.16 K3.12
NetLED1_1: LED1.1 R5.1 | length 2.3
  Top Layer w0.762: LED1.1 R5.1@119.918,72.873
NetLED2_1: LED2.1 R6.1 | length 2.4
  Top Layer w0.762: LED2.1 119.918,75.463 R6.1
NetLED3_1: LED3.1 R7.1 | length 2.3
  Top Layer w1.27: LED3.1 40.97,71.78 R7.1
NetLED4_1: LED4.1 R8.1 | length 2.2
  Top Layer w0.762: LED4.1 40.97,74.32 R8.1
NetQ1_1: Q1.1 R43.2 | length 2.9
  Top Layer w0.508: Q1.1 59.968,58.369 R43.2
NetQ1_3: Q1.3 R42.1 U6.2 U6.3 | length 10.6
  Top Layer w0.508: U6.2 55.143,57.328 55.626,56.845 ; U6.3 54.966,58.598 Q1.3 55.626,56.845 ; R42.1 55.626,55.904 55.626,56.845
NetR11_2: R11.2 U7.1 | length 5.2
  Top Layer w0.508: U7.1 81.661,48.971 82.499,49.809 R11.2
NetR13_2: R13.2 U7.3 | length 5.2
  Top Layer w0.508: U7.3 83.336,51.511 R13.2
NetR15_2: R15.2 U7.5 | length 5.1
  Top Layer w0.508: U7.5 83.565,54.051 R15.2
NetR17_2: R17.2 U7.7 | length 5
  Top Layer w0.508: U7.7 83.743,56.591 R17.2
NetR19_2: R19.2 U8.1 | length 5.4
  Top Layer w0.508: R19.2 117.323,60.452 117.805,60.935 U8.1
NetR21_2: R21.2 U8.3 | length 5.3
  Top Layer w0.508: R21.2 117.043,58.115 117.323,58.395 U8.3
NetR23_2: R23.2 U8.5 | length 5.2
  Top Layer w0.508: R23.2 115.266,55.855 U8.5
NetR25_2: R25.2 U8.7 | length 5.2
  Top Layer w0.508: R25.2 115.317,53.315 U8.7
NetR29_2: R29.2 U5.1 | length 5.7
  Top Layer w0.508: R29.2 U5.1
NetR31_2: R31.2 U5.7 | length 10.5
  Top Layer w0.508: R31.2 80.366,86.741 81.305,87.681 81.305,90.068 82.22,90.983 82.22,92.38 82.728,92.888 U5.7
NetR33_2: R33.2 U5.3 | length 6.6
  Top Layer w0.508: R33.2 80.127,95.926 82.169,97.968 U5.3
NetR35_2: R35.2 U5.5 | length 8.2
  Top Layer w0.508: R35.2 80.193,91.343 81.255,92.405 81.255,93.65 83.033,95.428 U5.5
NetR41_1: R41.1 U6.1 | length 5.3
  Top Layer w0.508: U6.1 52.308,54.702 53.594,53.416 R41.1
NRST: C3.2 JP1.1 R4.2 U1.14 | length 23.2
  Top Layer w0.254: R4.2 83.083,64.643 84.912,66.472 84.912,72.187 86.52,73.795 U1.14
  Top Layer w0.508: JP1.1 78.665,69.57 C3.2 R4.2
OSC_IN: C1.2 R3.2 U1.12 Y1.2 | length 18
  Top Layer w0.254: Y1.2@82.956,77.419 82.956,75.946 84.107,74.795 U1.12
  Top Layer w0.508: C1.2 79.02,76.659 R3.2 81.992,76.455 82.956,77.419 Y1.2
OSC_OUT: C2.2 R3.1 U1.13 Y1.1 | length 17.8
  Top Layer w0.254: Y1.1@82.956,71.018 82.956,73.33 83.922,74.295 U1.13
  Top Layer w0.508: R3.1 78.919,74.572 C2.2 81.61,72.365 82.956,71.018 Y1.1@82.956,69.647
RXD1_CPU: K3.9 U1.69 | length 28.5
  Top Layer w0.254: U1.69 107.896,77.295 109.144,76.048 v2(109.144,75.438)
  Bottom Layer w0.254: v2(109.144,75.438) 109.144,91.237 111.176,93.269 K3.9
RXD2_CPU: R41.2 U1.26 | length 43.5
  Top Layer w0.254: R41.2 58.776,53.416 59.614,54.254 59.614,56.54 60.604,57.531 63.779,57.531 64.668,58.42 64.668,59.919 65.1,60.35 72.746,60.35 73.609,59.487 82.88,59.487 87.579,64.186 87.579,66.269 88.006,66.695 U1.26
RXD3_CPU: U1.48
RXD4_CPU: U1.79
RXD5_CPU: U1.83
SIN11: C33.1 J9.1 R33.1 | length 28.8
  Top Layer w0.762: J9.1 59.08,102.997 66.152,95.926 R33.1 C33.1
SIN12: C31.1 J10.1 U5.2 | length 24.2
  Top Layer w0.508: C31.1 80.792,98.217 v2(81.813,99.238) U5.2
  Bottom Layer w0.762: J10.1 71.399,102.108 74.27,99.238 v2(81.813,99.238)
SIN21: C34.1 J11.1 R35.1 | length 39.1
  Top Layer w0.762: v2(75.672,91.343) R35.1 C34.1
  Bottom Layer w0.762: v2(75.672,91.343) 80.752,91.343 87.097,97.688 87.097,101.219 94.412,108.534 J11.1
SIN22: C32.1 J12.1 U5.8 | length 47.7
  Top Layer w0.508: C32.1 83.743,90.753 U5.8 U5.8@83.744,91.618
  Bottom Layer w0.762: v2(83.769,90.449) 83.769,92.405 88.697,97.333 88.697,100.635 91.882,103.82 112.075,103.82 114.3,106.045 J12.1
SOUT11: C43.1 R34.1 U1.84 U5.13 | length 27.8
  Top Layer w0.254: U1.84 v2(99.358,95.942)
  Top Layer w0.508: U5.13 v2(92.126,96.698) 93.444,96.698 C43.1 R34.1
  Bottom Layer w0.508: v2(92.126,96.698) 98.603,96.698 v2(99.358,95.942)
SOUT12: C41.1 R30.1 U1.86 U5.15 | length 32.7
  Top Layer w0.254: v2(97.688,100.863) 98.358,100.194 U1.86
  Top Layer w0.508: U5.15 91.745,99.238 92.177,99.67 v2(92.177,101.016) 92.675,101.514 C41.1 R30.1
  Bottom Layer w0.508: v2(92.177,101.016) 97.536,101.016 v2(97.688,100.863)
SOUT21: C44.1 R36.1 U1.87 U5.11 | length 22.3
  Top Layer w0.254: v2(97.511,91.161) 97.858,90.813 U1.87
  Top Layer w0.508: U5.11 92.481,94.158 92.921,94.597 R36.1 C44.1
  Bottom Layer w0.508: v2(92.227,94.209) 94.463,94.209 v2(97.511,91.161)
SOUT22: C42.1 R32.1 U1.85 U5.9 | length 26.4
  Top Layer w0.254: v2(98.858,79.376) U1.85
  Top Layer w0.508: U5.9 89.807,90.38 90.201,89.986 R32.1 C42.1
  Bottom Layer w0.508: v2(92.126,90.018) 97.13,90.018 98.858,88.289 v2(98.858,79.376)
SPEED11: C22.1 J4.4 R14.2 U7.13 | length 30.7
  Top Layer w0.508: R14.2 C22.1 64.694,52.299 65.303,51.689 65.303,50.902 66.243,49.962 69.875,49.962 70.612,50.698 70.612,52.273 v2(71.12,52.781) U7.13
  Bottom Layer w0.762: J4.4 69.197,50.858 v2(71.12,52.781)
SPEED12: C23.1 J4.5 R16.2 U7.11 | length 27.1
  Top Layer w0.508: C23.1 R16.2 v2(70.282,54.102) 71.501,55.321 U7.11
  Bottom Layer w0.762: J4.5 65.237,52.338 67.001,54.102 v2(70.282,54.102)
SPEED13: C24.1 J4.6 R18.2 U7.9 | length 31.3
  Top Layer w0.508: R18.2 C24.1 v2(70.231,56.413) 70.231,56.845 71.247,57.861 U7.9
  Bottom Layer w0.762: J4.6 61.277,50.609 67.081,56.413 v2(70.231,56.413)
SPEED21: C26.1 J6.4 R22.2 U8.13 | length 49.3
  Top Layer w0.508: U8.13 127.914,57.125 128.353,56.686 v2(128.499,56.686) R22.2 C26.1
  Bottom Layer w0.762: J6.4 109.938,52.56 118.72,61.341 128.905,61.341 129.963,60.283 129.963,57.421 129.286,56.744 128.557,56.744 v2(128.499,56.686)
SPEED22: C27.1 J6.5 R24.2 U8.11 | length 69.3
  Top Layer w0.508: U8.11 127.457,54.585 128.245,53.797 128.245,53.01 129.108,52.146 v2(131.42,52.146) 132.791,52.146 135.038,54.393 C27.1 R24.2
  Bottom Layer w0.762: J6.5 105.978,53.654 114.96,62.636 130.2,62.636 131.412,61.424 131.412,52.153 v2(131.42,52.146)
SPEED23: C28.1 J6.6 R26.2 U8.9 | length 75.4
  Top Layer w0.508: U8.9 127.559,52.045 128.524,51.079 133.883,51.079 134.857,52.053 R26.2 C28.1
  Bottom Layer w0.762: J6.6 102.018,52.615 113.436,64.033 131.242,64.033 133.756,61.519 v2(133.756,51.257)
SPEED_R11: R13.1 U1.41 | length 25.4
  Top Layer w0.254: R13.1 87.071,52.197 88.24,53.365 88.24,60.579 89.865,62.205 97.917,62.205 98.858,63.146 U1.41
SPEED_R12: R15.1 U1.40 | length 22.6
  Top Layer w0.254: R15.1 86.843,54.559 87.554,55.27 87.554,60.909 89.383,62.738 97.384,62.738 98.358,63.713 U1.40
SPEED_R13: R17.1 U1.39 | length 19.5
  Top Layer w0.254: R17.1 85.802,60.148 88.9,63.246 96.901,63.246 97.858,64.203 U1.39
SPEED_R21: R21.1 U1.57 | length 20
  Top Layer w0.254: U1.57 107.826,71.295 109.169,69.952 109.169,59.512 110.566,58.115 R21.1
SPEED_R22: R23.1 U1.56 | length 21.7
  Top Layer w0.254: U1.56 107.335,70.795 108.534,69.596 108.534,57.531 110.287,55.778 R23.1
SPEED_R23: R25.1 U1.55 | length 23.4
  Top Layer w0.254: U1.55 107.073,70.295 107.848,69.52 107.848,55.931 110.338,53.442 R25.1
SWITCH1: S1.8 U1.59 | length 14.5
  Top Layer w0.254: U1.59 108.858,72.295 110.439,70.714 110.439,68.148 112.903,65.684 S1.8
SWITCH2: S1.7 U1.60 | length 13.9
  Top Layer w0.254: U1.60 109.323,72.795 111.074,71.044 111.074,69.088 113.208,66.954 S1.7
SWITCH3: S1.6 U1.61 | length 13.2
  Top Layer w0.254: U1.61 109.61,73.295 111.709,71.196 111.709,69.774 113.259,68.224 S1.6
SWITCH4: S1.5 U1.62 | length 12.9
  Top Layer w0.254: U1.62 110.203,73.795 112.217,71.78 112.217,70.409 113.132,69.494 S1.5
TCK/SWCLK: J1.3 U1.76 | length 28
  Top Layer w0.254: U1.76 112.934,81.895 113.513,82.474 122.53,82.474 124.003,81.001 124.003,78.562 125.194,77.371 J1.3
TMS/SWDIO: J1.2 U1.72 | length 23.8
  Top Layer w0.254: U1.72 109.546,78.795 111.277,77.064 123.622,77.064 124.814,75.871 J1.2
TXD1_CPU: K3.8 U1.68 | length 32
  Top Layer w0.254: U1.68 107.126,76.795 107.899,76.022 v2(107.899,74.981)
  Bottom Layer w0.254: v2(107.899,74.981) 107.899,93.447 110.515,96.063 114.986,96.063 115.697,95.352 K3.8
TXD2_CPU: R43.1 U1.25 | length 34.4
  Top Layer w0.254: R43.1 63.525,59.055 64.059,59.588 64.059,60.223 64.694,60.858 73.101,60.858 73.99,59.969 82.423,59.969 86.792,64.338 86.792,67.945 87.142,68.295 U1.25
TXD3_CPU: U1.47
TXD4_CPU: U1.78
TXD5_CPU: U1.80
USR_K3_RST: K3.4 R47.1 U1.81 | length 27.7
  Top Layer w0.254: U1.81 100.858,89.377 v2(102.615,91.134)
  Top Layer w0.508: v2(102.615,91.134) R47.1 ; v2(106.477,91.465) 115.976,91.465 117.221,90.221 K3.4
  Bottom Layer w0.508: v2(102.615,91.134) 102.946,91.465 v2(106.477,91.465)
pads on no net: K3.1 K3.2 K3.3 K3.5 K3.17 Pad1.1 Pad2.1 Pad3.1 Pad4.1 U1.1 U1.2 U1.3 U1.4 U1.5 U1.7 U1.8 U1.9 U1.15 U1.16 U1.17 U1.18 U1.23 U1.24 U1.29 U1.30 U1.31 U1.32 U1.33 U1.34 U1.35 U1.36 U1.38 U1.43 U1.44 U1.45 U1.51 U1.52 U1.53 U1.54 U1.63 U1.64 U1.65 U1.66 U1.67 U1.77 U1.82 U1.88 U1.89 U1.90 U1.91 U1.92 U1.93 U1.95 U1.96 U1.97 U1.98 U2.8
copper on no net:
  other v3: 133.477,84.887 133.477,97.587

## Polygon pours and split planes (outlines as drawn)
GND on Top Layer "Bottom Layer-No Net" (solid, remove dead copper, pour order 22): 84.142,101.712 84.318,101.887 127.033,101.887 127.509,101.887 129.827,99.569 129.871,99.525 144.966,99.525 144.966,51.367 145.194,51.138 144.686,50.63 138.082,50.63 66.302,50.63 60.562,56.371 60.714,56.523 60.714,81.237 62.467,81.237 83.472,102.243
24V0 on Top Layer "Bottom Layer-No Net" (solid, remove dead copper, pour order 12): 54.458,112.42 54.661,112.217 124.79,112.217 124.79,103.734 124.282,103.226 122.631,101.575 119.532,101.575 88.113,101.575 80.213,93.675 70.231,83.693 70.231,78.181 70.231,63.221 75.489,57.963 76.632,56.82 123.647,56.82 128.295,56.82 131.496,53.619 132.41,52.705 132.41,35.585 55.169,35.585 54.864,35.89 44.856,45.898 44.856,48.057 38.303,48.057 35.509,50.851 34.138,52.222 34.138,93.65 34.138,93.955 38.786,98.603 39.091,98.908 45.593,98.908 45.593,99.543 51.257,105.207 54.254,108.204 54.254,112.014
GND on Bottom Layer "Bottom Layer-No Net" (solid, remove dead copper, pour order 18): 85.014,102.743 85.369,102.387 126.771,102.387 128.422,102.387 130.607,100.203 131.216,99.593 145.136,99.593 146.66,99.593 147.244,99.009 147.091,98.857 147.091,51.029 147.091,50.876 146.66,50.444 145.542,51.562 68.072,51.562 68.047,51.562 62.078,57.531 62.179,57.633 62.179,81.102 63.525,81.102 84.353,101.93
24V0 on Bottom Layer "Bottom Layer-No Net" (solid, remove dead copper, pour order 14): 54.864,111.785 124.358,111.785 124.689,112.116 124.587,112.014 124.587,103.454 124.485,103.454 123.038,102.006 122.834,102.21 91.592,102.21 88.29,102.21 83.033,96.952 70.434,84.353 70.434,83.033 70.434,62.484 72.288,60.63 76.673,56.246 83.909,56.246 128.666,56.246 131.699,53.213 132.309,52.603 132.309,35.585 55.778,35.585 54.661,36.703 44.552,46.812 44.552,48.158 38.46,48.158 34.933,51.685 34.572,52.046 34.572,93.779 35.512,93.779 40.538,98.806 40.64,98.908 46.406,98.908 46.406,100.762 54.559,108.915 55.372,109.728 55.372,111.887

## Keep-outs
Keep-Out Layer:
  lines w0.2: 34.138,37.16 34.138,109.755 cw(c36.664,109.982) 36.333,112.497 ; 34.138,37.236 ccw(c36.652,37.567) 36.728,35.032 ; 36.246,112.497 144.932,112.497 ; 36.728,35.027 145.44,35.027 ; 144.791,112.449 cw(c145.121,109.935) 147.625,110.338 147.625,37.897 cw(c145.11,37.567) 145.44,35.052

## Silkscreen, mask and mechanical layers (free items; w line width, h text height)
Top Overlay:
  circle w0.254: c45.949,38.354 r1.5
  circle w0.254: c46.888,108.89 r1.5
  circle w0.254: c136.144,109.195 r1.5
  circle w0.254: c143.967,48.235 r1.5
  text "NPN" at 125.959,108.052 h0.8
  text "NPN" at 83.058,107.874 h0.8
  text "PNP" at 94.539,107.874 h0.8
  text "PNP" at 51.892,107.467 h0.8
  text "SENSOR" at 125.959,106.324 h0.8
  text "SENSOR" at 94.361,106.197 h0.8
  text "SENSOR" at 83.058,106.147 h0.8
  text "SENSOR" at 51.638,105.308 h0.8
  text "SIN12" at 69.799,102.667 h0.8
  text "SIN11" at 57.48,102.641 h0.8
  text "24V0" at 104.343,102.616 h0.8
  text "24V0" at 73.914,102.591 h0.8
  text "+24V" at 77.876,102.591 h0.8
  text "SIN21" at 99.949,102.591 h0.8
  text "+24V" at 107.874,102.591 h0.8
  text "SIN22" at 112.497,102.591 h0.8
  text "+24V" at 120.828,102.591 h0.8
  text "24V0" at 117.323,102.565 h0.8
  text "24V0" at 61.747,102.54 h0.8
  text "+24V" at 65.38,102.54 h0.8
  text "+24V_IN" at 43.612,92.405 h0.8
  text "24V0" at 43.739,86.462 h0.8
  text "+24V_IN" at 43.485,82.575 h0.8
  text "24V0" at 43.764,78.918 h0.8
  text "GND" at 130.658,78.562 h0.8
  text "SCLK" at 130.708,77.038 h0.8
  text "SDIO" at 130.734,75.387 h0.8
  text "+3V3" at 130.785,73.736 h0.8
  text "A" at 44.806,66.294 h0.8
  text "B" at 44.882,63.932 h0.8
  text "GND" at 44.425,61.316 h0.8
  text "A" at 44.552,54.635 h0.8
  text "B" at 44.552,52.222 h0.8
  text "Willach Heise" at 100.508,51.841 h0.8
  text "belt_control_V2.0" at 100.635,50.546 h0.8
  text "GND" at 44.171,49.657 h0.8
  text "2019-11-19" at 100.559,49.225 h0.8
  text "SP13" at 60.147,44.526 h0.8
  text "SP12" at 63.906,44.526 h0.8
  text "SP11" at 68.021,44.526 h0.8
  text "DIR11" at 71.501,44.526 h0.8
  text "24V0" at 75.946,44.526 h0.8
  text "24V0" at 79.985,44.526 h0.8
  text "+24V" at 84.125,44.526 h0.8
  text "24V0" at 88.392,44.526 h0.8
  text "SP23" at 100.305,44.45 h0.8
  text "SP22" at 104.47,44.45 h0.8
  text "SP21" at 108.382,44.45 h0.8
  text "DIR21" at 112.141,44.45 h0.8
  text "24V0" at 116.535,44.45 h0.8
  text "24V0" at 120.599,44.45 h0.8
  text "+24V" at 124.562,44.45 h0.8
  text "24V0" at 129.108,44.45 h0.8
Bottom Overlay:
  circle w0.254: c45.949,38.354 r1.5
  circle w0.254: c46.888,108.89 r1.5
  circle w0.254: c136.144,109.195 r1.5
  circle w0.254: c143.967,48.235 r1.5

## Text inside footprints (layer, text, board x,y; h text height)
K3: Top Overlay "Compatible K7" at 110.744,86.563 h0.8 r90